# Altium PCB 175-00008 rev 1, PCB, M2 Focus Drive_OLD.PcbDoc (part 2 of 2)
Units mil, origin at the board's own origin, x right, y up, seen from the top; angles counter-clockwise.
Board outline 6885.96 x 6885.86 mil, 8 copper layers (Top Layer (*.GTL), Mid-Layer 1 (*.G1), +24V (*.GP1), GND (*.GP2), +5V (*.GP3), +12V (*.GP4), -12V (*.GP5), Bottom Layer (*.GBL)); 112 components, 149 nets, 812 pads, 83 vias.
Unrouted connection lines stored in the file: 204.
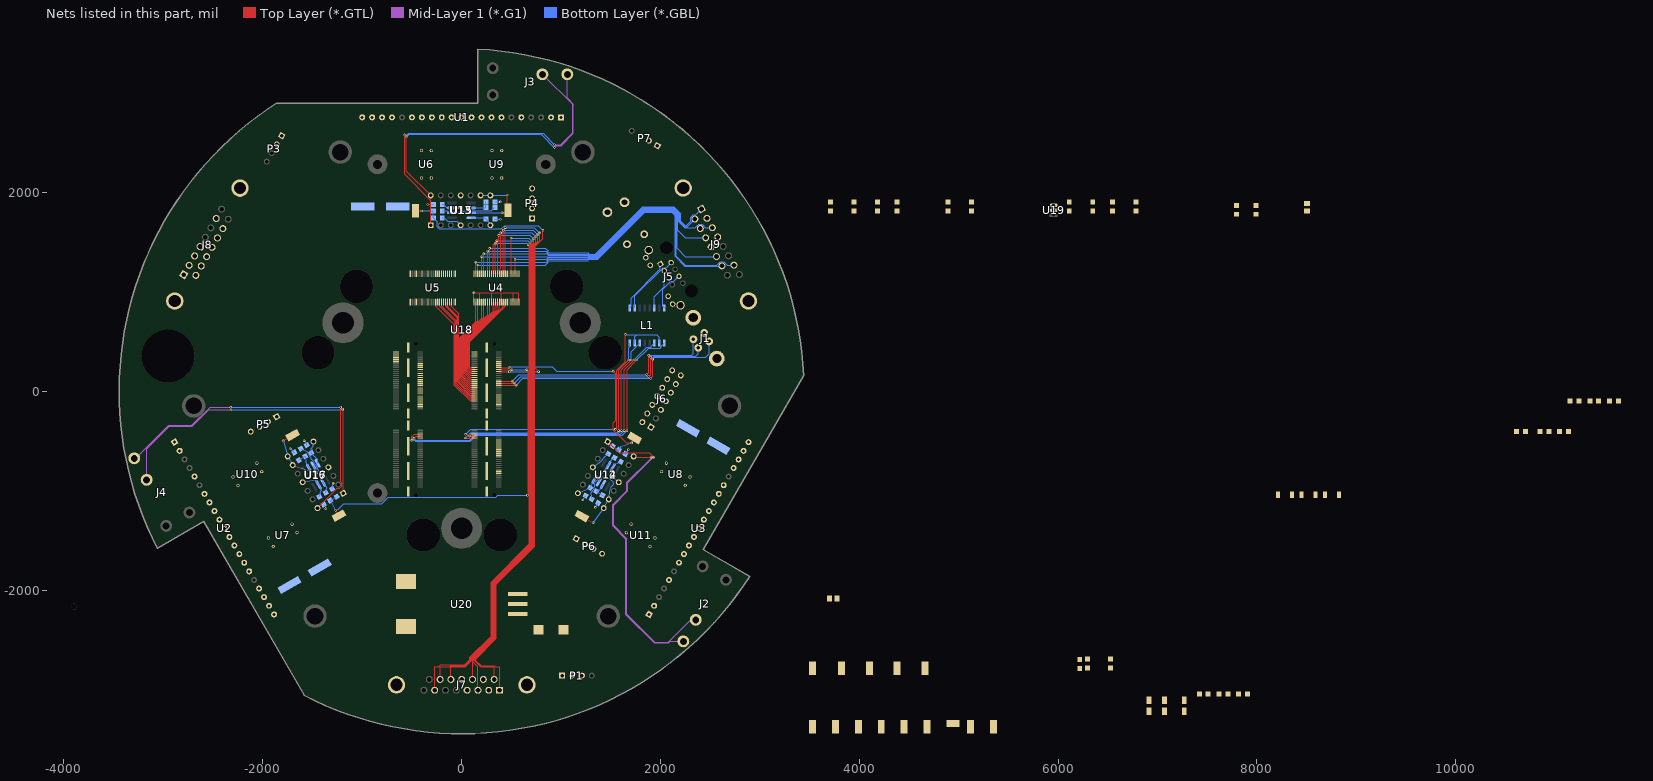
[diagram p8: the nets of this part, all layers, seen from the top]

## Via types
v1: diameter 24, hole 10, Top Layer (*.GTL) to Bottom Layer (*.GBL), 83 vias

## Nets (pads, with @x,y where several pads share a name; then routed paths per layer and width w, separated by ;. In a path a pad name is that pad's centre, name@x,y a point inside that pad or via, vN(x,y) a via of type N, cw(c..) or ccw(c..) an arc to the next point about the centre after c; other vN are vias at no path point)
1A+: J7.1 U4.32 | length 5908.2
  Top Layer (*.GTL) w5: J7.1@381.39,-3007.12 381.39,-2771 339.76,-2771 330.76,-2762 195.32,-2762 136.59,-2703.27 136.59,-2698 350,-2484.59 350,-1942 734,-1558 734,1463.93 785.49,1515.42 785.49,1592.49 v1(786.79,1593.79) ; U4.32@438.58,1182.72 438.58,1645.58 v1(439,1646)
  Bottom Layer (*.GBL) w5: v1(439,1646) 728.93,1646 781.14,1593.79 v1(786.79,1593.79)
1A-: J7.9 U4.33 | length 5703.6
  Top Layer (*.GTL) w5: J7.9@327.03,-2898.4 327.03,-2771 191.59,-2771 127.59,-2707 127.59,-2694.27 341,-2480.86 341,-1938.27 725,-1554.27 725,1467.65 765.7,1508.35 765.7,1572.7 v1(766.99,1573.99) ; U4.33@418.9,1182.72 418.9,1619.9 v1(419,1620)
  Bottom Layer (*.GBL) w5: v1(419,1620) 718.16,1620 764.17,1573.99 v1(766.99,1573.99)
1B+: J7.3 U4.35 | length 5628.6
  Top Layer (*.GTL) w5: J7.3@163.95,-3007.12 163.95,-2771 118.59,-2725.64 118.59,-2690.54 332,-2477.13 332,-1934.54 716,-1550.54 716,1471.38 745.9,1501.28 745.9,1552.9 v1(747.2,1554.2) ; U4.35@379.53,1182.72 379.53,1225.53 392,1238 v1(392,1594)
  Bottom Layer (*.GBL) w5: v1(392,1594) 707.39,1594 v1(747.2,1554.2)
1B-: J7.11 U4.36 | length 5448.2
  Top Layer (*.GTL) w5: J7.11@109.59,-2898.4 109.59,-2686.82 323,-2473.4 323,-1930.82 707,-1546.82 707,1475.11 726.1,1494.21 726.1,1533.1 v1(727.4,1534.4) ; U4.36@359.84,1182.72 364.5,1187.37 364.5,1499.34 373.5,1508.34 373.5,1567.5 v1(373,1568)
  Bottom Layer (*.GBL) w5: v1(373,1568) 685.31,1568 718.91,1534.4 v1(727.4,1534.4)
1I+: J7.14 U4.37 | length 5591.1
  Top Layer (*.GTL) w5: J7.14@-216.57,-2898.4 -216.57,-2771 -120.58,-2771 -111.58,-2762 32.86,-2762 91.59,-2703.27 91.59,-2679.36 305,-2465.95 305,-1923.36 689,-1539.36 689,1493.6 v1(687.8,1494.8) ; U4.37@340.16,1182.72 340.16,1466.99 355.5,1482.34 355.5,1515.5 v1(355,1516)
  Bottom Layer (*.GBL) w5: v1(355,1516) 663.77,1516 684.97,1494.8 v1(687.8,1494.8)
1I-: J7.7 U4.38 | length 5698.5
  Top Layer (*.GTL) w5: J7.7@-270.93,-3007.12 -270.93,-2771 -229.3,-2771 -211.3,-2753 29.13,-2753 82.59,-2699.54 82.59,-2675.63 296,-2462.22 296,-1919.63 680,-1535.63 680,1463 v1(668,1475) ; U4.38@320.47,1182.72 320.47,1473.47 v1(337,1490)
  Bottom Layer (*.GBL) w5: v1@336.03,1490 653,1490 v1(668,1475)
2A+: J9.1 U4.40 | length 2839.6
  Top Layer (*.GTL) w5: v1(281,1438) 281.1,1437.9 U4.40@281.1,1182.72
  Bottom Layer (*.GBL) w5: v1(281,1438) 843.33,1438 870,1411.33 870,1393 1273.66,1393 1280,1386.66 1280,1381 1346.63,1381 1820.63,1855 2134.37,1855 2203,1786.37 2203,1710.53 2250,1663.53 2259,1663.53 2305.07,1709.6 2305.07,1749.59 2329.38,1773.9 2353.61,1773.9 J9.1@2413.55,1833.84
2A-: J9.9 U4.41 | length 2692
  Top Layer (*.GTL) w5: v1(261,1410) 261.42,1409.58 U4.41@261.42,1182.72
  Bottom Layer (*.GBL) w5: v1(261,1410) 858.6,1410 861,1407.6 861,1389.27 870,1380.27 870,1380 1268.27,1380 1276.27,1372 1350.36,1372 1824.36,1846 2130.64,1846 2194,1782.64 2194,1706.8 2246.27,1654.53 2268.7,1654.53 J9.9@2346.57,1732.4
2B+: J9.3 U4.43 | length 2858.3
  Top Layer (*.GTL) w5: v1(222,1383) v1(222,1383) U4.43@222.05,1182.72
  Bottom Layer (*.GBL) w5: v1@222,1382 v1@223,1382 ; v1(222,1383) v1@223,1382 ; J9.3@2522.27,1645.53 2452.34,1645.53 2418.12,1679.75 2383.74,1679.75 2349.52,1645.53 2242.54,1645.53 2185,1703.08 2185,1778.91 2126.91,1837 1828.09,1837 1354.09,1363 1272.54,1363 1268.54,1367 870,1367 855,1382 243,1382 v1@223,1382
2B-: J9.11 U4.44 | length 2829.8
  Top Layer (*.GTL) w5: U4.44@202.36,1182.72 202.36,1353.36 v1(203,1354)
  Bottom Layer (*.GBL) w5: v1(203,1354) 1357.82,1354 1831.82,1828 2123.18,1828 2176,1775.18 2176,1618.09 2250,1544.09 J9.11@2455.29,1544.09
2I+: J9.14 U4.46 | length 3239.8
  Top Layer (*.GTL) w5: U4.46@162.99,1182.72 v1(163,1270)
  Bottom Layer (*.GBL) w5: v1(163,1270) 843.33,1270 870,1296.67 870,1315 1273.66,1315 1280,1321.34 1280,1327 1369,1327 1843,1801 2112,1801 2149,1764 2149,1357.19 2246.27,1259.91 2616.65,1259.91 J9.14@2618.37,1261.63
2I-: J9.7 U4.47 | length 3427.3
  Top Layer (*.GTL) w5: v1(143,1299) 143.31,1298.69 U4.47@143.31,1182.72
  Bottom Layer (*.GBL) w5: v1(143,1299) 144,1298 858.6,1298 861,1300.4 861,1318.73 870,1327.73 870,1328 1268.27,1328 1276.27,1336 1365.27,1336 1839.27,1810 2115.73,1810 2158,1767.73 2158,1360.91 2250,1268.91 2566.96,1268.91 2601.18,1303.13 2635.56,1303.13 2669.78,1268.91 J9.7@2739.7,1268.91
3.3V: R4.2 R5.2 R6.2 R18.2 R26.2 R27.2 R28.2 U18.B121
3A+: J8.1 U5.27
3A-: J8.9 U5.29
3B+: J8.3 U5.30
3B-: J8.11 U5.32
3I+: J8.14 U5.33
3I-: J8.7 U5.35
24V: R1.2 R2.2 R3.2
+3.3V: U4.7 U4.18 U4.31 U4.42 U5.7 U5.18 U5.31 U5.42
+5V: C7.1 C8.1 C9.1 C12.POS J7.4 J7.12 J8.4 J8.12 J9.4 J9.12 TP17.1 U1.14 U2.14 U3.14 U20.3
+12V: C22.2 C23.2 C28.2 R20.1 R22.1 R23.1 U12.11 U13.11 U14.7 U15.7 U16.11 U17.7 | length 806.8
  Bottom Layer (*.GBL) w5: U16.11@-1599.9,-915 -1475,-891 U17.7@-1438.42,-941.03 -1412,-997 C28.2@-1432.5,-1061.03 ; C23.2@-195,1880 -186,1880 -151,1845 U15.7@-96.46,1845 -25,1845 v1(-24,1846) ; U12.11@1579.9,-915 1491,-842 1490,-822 U14.7@1519.88,-768.97 1540,-736 C22.2@1602.5,-708.97
+24V: C1.1 C2.1 C3.1 C4.2 C5.2 C6.2 C10.1 F1.2 P1.1 TP16.1 U1.12 U2.12 U3.12 U18.B55 U20.1
-12V: C25.2 C27.2 C30.2 U12.7 U13.7 U14.4 U15.4 U16.7 U17.4 | length 718.2
  Bottom Layer (*.GBL) w5: U16.7@-1490.1,-505.19 -1490.1,-554.1 -1512.5,-576.5 C30.2@-1512.5,-618.97 -1512.5,-622.5 -1448.28,-686.72 U17.4@-1448.28,-723.97 ; U15.4@96.46,1745 231,1745 290,1686 U13.7@290,1670 ; U12.7@1170.1,-1024.81 C25.2@1292.5,-971.03 U14.4@1336.82,-886.03
CURRENT_AX1: TP1.1 U1.5 U18.A2
CURRENT_AX2: TP2.1 U2.5 U18.A4
CURRENT_AX3: TP3.1 U3.5 U18.A6
DIRECTION1: TP7.1 U1.16 U18.B39
DIRECTION2: TP8.1 U2.16 U18.B41
DIRECTION3: TP9.1 U3.16 U18.B43
DRVFAULT_AX1: U1.19 U18.A73
DRVFAULT_AX2: U2.19 U18.A77
DRVFAULT_AX3: U3.19 U18.A81
EMU: J6.2 U18.A47
ENCDR_FAULT_AX1: U4.20 U18.A83
ENCDR_FAULT_AX2: U4.22 U18.A85
ENCDR_FAULT_AX3: U4.23 U18.A87
ETHERGND: U18.B69
ETHERLED_ACT: R17.1 U18.A103
ETHERLED_FD: R16.1 U18.A105
ETHERRX+: L1.11 U18.B67 | length 3268.2
  Top Layer (*.GTL) w5: v1(-481,-474) -457.8,-450.8 U18.B67@-417.32,-450.8 ; v1(1636,-395) 1636,215 v1(1736,315)
  Bottom Layer (*.GBL) w5: v1(-481,-474) -462.36,-492.64 80.64,-492.64 140.27,-433 1596.16,-433 1634.16,-395 v1(1636,-395) ; v1(1736,315) 1864.5,443.5 1905.19,443.5 1909,447.31 1909,454 L1.11@1940,485
ETHERRX-: L1.9 U18.B65 | length 3446.3
  Top Layer (*.GTL) w5: v1(-500.8,-493.8) -500.8,-454.8 -477.11,-431.11 U18.B65@-417.32,-431.11 ; v1(1664,-395) 1664,215 v1(1764,315)
  Bottom Layer (*.GBL) w5: v1(-500.8,-493.8) -473.93,-493.8 -466.09,-501.64 84.36,-501.64 144,-442 1615.16,-442 1662.16,-395 v1(1664,-395) ; v1(1764,315) 1883.5,434.5 1996.19,434.5 2009,447.31 2009,454 L1.9@2040,485
ETHERTX+: L1.16 U18.A70 | length 2596.4
  Top Layer (*.GTL) w5: v1(35,-470) 129.05,-470 U18.A70@129.53,-470.48 ; v1(1580,-395) 1580,215 v1(1680,315)
  Bottom Layer (*.GBL) w5: v1(35,-470) 90,-415 1560,-415 v1(1580,-395) ; v1(1680,315) 1680,437.19 1690,447.19 L1.16@1690,485
ETHERTX-: L1.14 U18.A68 | length 2560.9
  Top Layer (*.GTL) w5: v1(79.66,-451.5) 80.37,-450.8 U18.A68@129.53,-450.8 ; v1(1608,-395) 1608,215 v1(1708,315)
  Bottom Layer (*.GBL) w5: v1(79.66,-451.5) 79.66,-445.34 101,-424 1577.16,-424 1606.16,-395 v1(1608,-395) ; v1(1708,315) 1708,396.31 1759,447.31 1759,454 L1.14@1790,485
FAN_PWM: P1.2 U18.B10
FAN_TACH: R19.1 U18.B57
FULL_STEP_AX1: U1.18 U18.A71
FULL_STEP_AX2: U2.18 U18.A75
FULL_STEP_AX3: U3.18 U18.A79
GND: C1.2 C2.2 C3.2 C4.1 C5.1 C6.1 C7.2 C8.2 C9.2 C10.2 C12.NEG C22.1 C23.1 C24.1 C25.1 C26.1 C27.1 C28.1 C29.1 C30.1 C31.1 C32.1 C33.1 J1.4 J1.5 J1.6 J5.10 J5.11 J5.13 J5.14 J6.1 J6.4 J6.7 J6.9 J6.11 J6.13 J7.2 J7.10 J7.16 J7.17 J8.2 J8.10 J8.16 J8.17 J9.2 J9.10 J9.16 J9.17 P2.2 P3.2 P7.2 R7.1 R9.1 R13.1 S1.1 S2.1 S3.1 U1.11 U2.11 U3.11 U4.1 U4.4 U4.10 U4.15 U4.21 U4.24 U4.25 U4.28 U4.34 U4.39 U4.45 U4.48 U5.1 U5.4 U5.10 U5.15 U5.21 U5.24 U5.25 U5.28 U5.34 U5.39 U5.45 U5.48 U6.E U7.E U8.E U9.E U9.K U10.E U10.K U11.E U11.K U12.4 U13.4 U16.4 U18.A121 U18.A122 U18.B4 U18.B8 U18.B12 U18.B19 U18.B29 U18.B49 U18.B53 U18.B122 U19.3 U20.2 | length 1982.6
  Top Layer (*.GTL) w10: U4.1@123.62,897.28 v1(123.62,990) 576.38,990 U4.24@576.38,897.28 ; U4.4@182.68,897.28 182.68,990 ; U4.10@300.79,897.28 300.79,990 ; U4.15@399.21,897.28 399.21,990 ; U4.21@517.32,897.28 517.32,990
  Bottom Layer (*.GBL) w10: v1(-1725,-575) -1723.53,-575 R13.1@-1682.5,-616.03 ; v1(-1584,-496) -1557.5,-522.5 C30.1@-1557.5,-541.03 ; C28.1@-1387.5,-1138.97 v1(-1366,-1182) ; C29.1@-1302.5,-981.03 v1(-1292,-924) ; v1(-341,1879) -340,1880 C23.1@-285,1880 ; C26.1@-195,1745 -173,1745 -138,1710 -50,1710 U13.4@-10,1670 ; C27.1@334,1732 390,1732 v1(391,1731) ; R9.1@335,1905 389,1905 v1(390,1906) ; v1(1220,-1093) C25.1@1247.5,-1048.97 ; U12.4@1320.1,-765 1405,-702 1408,-697 1429,-667 C24.1@1476.5,-628.97 ; v1(1345,-1168) R7.1@1372.5,-1123.97 ; C22.1@1647.5,-631.03 v1(1677,-586)
INDEX1+: U4.12 U18.A26 | length 922
  Top Layer (*.GTL) w5: U18.A26@129.53,159.44 85,159.44 44,200.44 44,513.52 340.16,809.68 U4.12@340.16,897.28
INDEX1-: U4.11 U18.A28 | length 941
  Top Layer (*.GTL) w5: U18.A28@129.53,139.75 85,139.75 35,189.75 35,517.25 320.47,802.72 U4.11@320.47,897.28
INDEX2+: U4.3 U18.A38 | length 1011.5
  Top Layer (*.GTL) w5: U18.A38@129.53,41.33 85,41.33 -10,136.33 -10,535.89 162.99,708.88 U4.3@162.99,897.28
INDEX2-: U4.2 U18.A40 | length 1030.5
  Top Layer (*.GTL) w5: U18.A40@129.53,21.64 85,21.64 -19,125.64 -19,539.62 143.31,701.92 U4.2@143.31,897.28
INDEX3+: U5.16 U18.A50 | length 1145.4
  Top Layer (*.GTL) w5: U5.16@-221.1,897.28 -221.1,857.19 -64,700.09 -64,72.22 85,-76.78 U18.A50@129.53,-76.78
INDEX3-: U5.14 U18.A52 | length 1181.4
  Top Layer (*.GTL) w5: U5.14@-260.47,897.28 -260.47,857.19 -73,669.72 -73,61.53 85,-96.47 U18.A52@129.53,-96.47
IR_TEMP1: C26.2 R12.2 TP11.1 U18.A21 | length 3329.8
  Top Layer (*.GTL) w5: TP11.1@-465,1815 -464,1814 v1(-403,1814) ; U18.A21@372.83,198.81 374.64,197 v1(480,197) ; v1(775,198) 743,230 743,1460.2 818,1535.2 v1(818,1619)
  Bottom Layer (*.GBL) w5: v1(-403,1814) -402,1815 R12.2@-285,1815 C26.2@-285,1745 -246.03,1706.03 -246.03,1655.08 -224.92,1633.97 400.81,1633.97 431.34,1664.5 772.5,1664.5 v1(818,1619) ; v1(480,197) 481,198 v1(775,198)
IR_TEMP2: C29.2 R15.2 TP14.1 U18.A19 | length 3800.6
  Top Layer (*.GTL) w5: v1(-1269,-1197) TP14.1@-1235,-1250 ; U18.A19@372.83,218.49 504.51,218.49 v1(505,218) ; v1(657,218) 671,204 671,-1038 663,-1046 v1(661,-1046)
  Bottom Layer (*.GBL) w5: C29.2@-1257.5,-1058.97 R15.2@-1322.5,-1098.97 -1303,-1135 v1(-1269,-1197) -1241,-1187 -1184.13,-1130.13 -802.34,-1130.13 -740.21,-1068 342.04,-1068 364.04,-1046 v1(661,-1046) ; v1(505,218) v1(657,218)
IR_TEMP3: C24.2 R11.2 TP10.1 U18.A17 | length 2307.4
  Top Layer (*.GTL) w5: U18.A17@372.83,238.18 373.66,239 v1(478,239) ; v1(1525,202) 1552.5,174.5 1552.5,-293 1527.5,-318 1527.5,-390.66 1655.84,-519 v1(1710,-519) TP10.1@1740,-470
  Bottom Layer (*.GBL) w5: v1(478,239) 484,245 912,245 955,202 v1(1525,202) ; C24.2@1521.5,-551.03 R11.2@1582.5,-591.03 1606,-553 v1(1710,-519)
NEGLIMT1: R26.1 U9.C U18.B27
NEGLIMT2: R27.1 U10.C U18.B25
NEGLIMT3: R28.1 U11.C U18.B23
NetF1_1: F1.1 P2.1
NetJ2_1: J2.1 U12.1 | length 3237.3
  Top Layer (*.GTL) w5: U12.1@1470.1,-505.19 1584.07,-619.16 1889.33,-619.16 1932.16,-662 v1(1934,-662)
  Mid-Layer 1 (*.G1) w5: v1(1934,-662) 1932.16,-662 1913.66,-680.5 1912.23,-680.5 1671.64,-921.09 1671.64,-1002.36 1528,-1146 1528,-1349 1662,-1483 1662,-2243 1941.64,-2522.64 2079.64,-2522.64 2303.7,-2298.57 J2.1@2355.24,-2298.57
NetJ2_2: J2.2 U12.14 | length 2681.6
  Top Layer (*.GTL) w5: U12.14@1729.9,-655.19 1736.71,-662 v1(1906,-662)
  Mid-Layer 1 (*.G1) w5: v1(1906,-662) 1906,-674 1662.64,-917.36 1662.64,-998.64 1519,-1142.27 1519,-1352.73 1653,-1486.73 1653,-2246.73 1937.91,-2531.64 2083.36,-2531.64 2099.92,-2515.08 J2.2@2230.24,-2515.08
NetJ3_1: J3.1 U13.1 | length 3529
  Top Layer (*.GTL) w5: v1(-574.8,2579.8) -573.5,2578.5 -573.5,2182.55 -310,1919.05 U13.1@-310,1670
  Mid-Layer 1 (*.G1) w5: J3.1@812.99,3188.97 1116,2885.96 1116,2599 997,2480 v1(934,2480)
  Bottom Layer (*.GBL) w5: v1(-574.8,2579.8) -547.93,2579.8 -532.73,2595 819,2595 v1(934,2480)
NetJ3_2: J3.2 U13.14 | length 3116.5
  Top Layer (*.GTL) w5: v1(-555,2560) -555,2215 U13.14@-310,1970
  Mid-Layer 1 (*.G1) w5: v1(934,2452) 953,2471 1000.73,2471 1125,2595.27 1125,2889.69 1062.99,2951.7 J3.2@1062.99,3188.97
  Bottom Layer (*.GBL) w5: v1(-555,2560) -529,2586 800,2586 v1(934,2452)
NetJ4_1: J4.1 U16.1 | length 3296
  Top Layer (*.GTL) w5: v1(-1197,-180) -1190.1,-186.9 U16.1@-1190.1,-1024.81
  Mid-Layer 1 (*.G1) w5: J4.1@-3168.23,-890.43 -3168.23,-578.23 -2943,-353 -2709.27,-353 -2544.27,-188 v1(-2322,-188)
  Bottom Layer (*.GBL) w5: v1(-2322,-188) -1205,-188 v1(-1197,-180)
NetJ4_2: J4.2 U16.14 | length 3425.2
  Top Layer (*.GTL) w5: U16.14@-1449.9,-1174.81 -1249.33,-974.23 -1225.17,-974.23 -1204.07,-953.13 -1204.07,-923.28 -1216.8,-910.55 v1(-1216.8,-160.2)
  Mid-Layer 1 (*.G1) w5: J4.2@-3293.23,-673.92 -3276.65,-673.92 -2946.73,-344 -2713,-344 -2529,-160 v1(-2322,-160)
  Bottom Layer (*.GBL) w5: v1(-2322,-160) -2321.8,-160.2 v1(-1216.8,-160.2)
NetJ5_1: J5.1 L1.1 | length 568.4
  Bottom Layer (*.GBL) w5: L1.1@1690,840 1705.12,855.12 1705.12,936.65 2000,1231.53 J5.1@2000,1280
NetJ5_2: J5.2 L1.2 | length 624.8
  Bottom Layer (*.GBL) w5: L1.2@1740,840 1740,958.8 2025.92,1244.72 2055.96,1244.72 J5.2@2106.6,1295.36
NetJ5_3: J5.3 L1.6 | length 412.1
  Bottom Layer (*.GBL) w5: L1.6@1940,840 1940,952.97 2040,1052.97 J5.3@2040,1210.72
NetJ5_6: J5.6 L1.8 | length 408.3
  Bottom Layer (*.GBL) w5: L1.8@2040,840 2024.12,855.88 2024.12,1024.35 2105.92,1106.15 2135.96,1106.15 J5.6@2186.6,1156.79
NetJ5_9: J5.9 R16.2
NetJ5_12: J5.12 R17.2
NetJ6_5: J6.5 R18.1
NetP1_3: P1.3 R19.2
NetP3_1: P3.1 R23.2 R24.2
NetP4_1: P4.1 U1.1
NetP4_2: P4.2 U1.2
NetP4_3: P4.3 U1.20
NetP4_4: P4.4 U1.21
NetP5_1: P5.1 U2.1
NetP5_2: P5.2 U2.2
NetP5_3: P5.3 U2.20
NetP5_4: P5.4 U2.21
NetP6_1: P6.1 U3.1
NetP6_2: P6.2 U3.2
NetP6_3: P6.3 U3.20
NetP6_4: P6.4 U3.21
NetP7_1: P7.1 R22.2 R25.2
NetR1_1: R1.1 U6.A
NetR2_1: R2.1 U7.A
NetR3_1: R3.1 U8.A
NetR7_2: R7.2 R8.1 U14.2 | length 180.6
  Bottom Layer (*.GBL) w5: R7.2@1417.5,-1046.03 R8.1@1352.5,-1006.03 1390,-990 U14.2@1423.42,-936.03
NetR8_2: R8.2 R11.1 U14.6 | length 494.7
  Bottom Layer (*.GBL) w5: R8.2@1307.5,-1083.97 1300,-1025 1325.06,-990.56 1333.15,-972.88 1336,-961 1335,-942 1356.24,-902.24 1363,-894 1374.58,-874.58 U14.6@1476.58,-743.97 1507,-694 R11.1@1537.5,-668.97
NetR9_2: R9.2 R10.1 U15.2 | length 205.6
  Bottom Layer (*.GBL) w5: U15.2@96.46,1845 240,1845 R10.1@245,1850 R9.2@245,1905
NetR10_2: R10.2 R12.1 U15.6 | length 561.1
  Bottom Layer (*.GBL) w5: R12.1@-195,1815 -151,1815 -131,1795 U15.6@-96.46,1795 -91.46,1800 9,1800 24.28,1815.28 300.28,1815.28 R10.2@335,1850
NetR13_2: R13.2 R14.1 U17.2 | length 205.9
  Bottom Layer (*.GBL) w5: R13.2@-1637.5,-693.97 R14.1@-1572.5,-653.97 -1570,-714 U17.2@-1534.88,-773.97
NetR14_2: R14.2 R15.1 U17.6 | length 543.4
  Bottom Layer (*.GBL) w5: R14.2@-1617.5,-576.03 -1559,-602 -1534,-650 -1520.14,-668.62 -1518,-679 -1498,-692 -1475,-732 -1469.94,-737.94 -1463,-747 -1460.35,-750 -1460.12,-754.12 -1454.06,-768 -1452,-777 -1410,-839 U17.6@-1395.12,-916.03 -1359,-972 R15.1@-1367.5,-1021.03
NetR20_2: R20.2 R21.2 U19.2
NetS1_2: S1.2 U1.13
NetS2_2: S2.2 U2.13
NetS3_2: S3.2 U3.13
NetTP12_1: TP12.1 U12.8 U12.9 U14.3 | length 791.8
  Top Layer (*.GTL) w5: TP12.1@1210,-1255 v1(1323,-1322)
  Bottom Layer (*.GBL) w5: v1(1323,-1322) U12.8@1429.9,-1174.81 U12.9@1479.9,-1088.21 1494.28,-986.28 1497,-978 1501,-969 1504,-959 1523,-938 1521,-904 1447,-856 1414,-858 U14.3@1380.12,-911.03
NetTP13_1: TP13.1 U13.8 U13.9 U15.3 | length 805.3
  Top Layer (*.GTL) w5: v1(407,1796) 441,1796 461,1816 v1(461,1975)
  Bottom Layer (*.GBL) w5: U15.3@96.46,1795 406,1795 v1(407,1796) ; U13.9@190,1970 U13.8@290,1970 456,1970 v1(461,1975)
NetTP15_1: TP15.1 U16.8 U16.9 U17.3 | length 714.7
  Top Layer (*.GTL) w5: v1(-1794,-499) TP15.1@-1700,-440
  Mid-Layer 1 (*.G1) w5: U16.9@-1699.9,-741.79 v1(-1456,-823)
  Bottom Layer (*.GBL) w5: v1(-1794,-499) U16.8@-1749.9,-655.19 U16.9@-1699.9,-741.79 ; U17.3@-1491.58,-748.97 -1457,-802 v1(-1456,-823)
NetU6_K: U6.K U9.A
NetU7_K: U7.K U10.A
NetU8_K: U8.K U11.A
PCB_TEMP: C31.2 R21.1 TP18.1 U18.A15
POSLIMT1: R4.1 U6.C U18.B17
POSLIMT2: R5.1 U7.C U18.B15
POSLIMT3: R6.1 U8.C U18.B13
QUADA1+: U4.17 U18.A18 | length 854.2
  Top Layer (*.GTL) w5: U18.A18@129.53,238.18 85,238.18 80,243.18 80,498.61 438.58,857.19 U4.17@438.58,897.28
QUADA1-: U4.16 U18.A20 | length 873.2
  Top Layer (*.GTL) w5: U18.A20@129.53,218.49 85,218.49 71,232.49 71,502.34 418.9,850.24 U4.16@418.9,897.28
QUADA2+: U4.9 U18.A30 | length 951.8
  Top Layer (*.GTL) w5: U18.A30@129.53,120.07 85,120.07 26,179.07 26,520.98 281.1,776.08 U4.9@281.1,897.28
QUADA2-: U4.8 U18.A32 | length 970.8
  Top Layer (*.GTL) w5: U18.A32@129.53,100.38 85,100.38 17,168.38 17,524.7 261.42,769.12 U4.8@261.42,897.28
QUADA3+: U5.22 U18.A42 | length 1017.7
  Top Layer (*.GTL) w5: U5.22@-102.99,897.28 -102.99,857.19 -28,782.2 -28,114.96 85,1.96 U18.A42@129.53,1.96
QUADA3-: U5.20 U18.A44 | length 1053.7
  Top Layer (*.GTL) w5: U5.20@-142.36,897.28 -142.36,857.19 -37,751.83 -37,104.27 85,-17.73 U18.A44@129.53,-17.73
QUADB1+: U4.14 U18.A22 | length 884.1
  Top Layer (*.GTL) w5: U18.A22@129.53,198.81 85,198.81 62,221.81 62,506.07 379.53,823.59 U4.14@379.53,897.28
QUADB1-: U4.13 U18.A24 | length 903
  Top Layer (*.GTL) w5: U18.A24@129.53,179.12 85,179.12 53,211.12 53,509.79 359.84,816.64 U4.13@359.84,897.28
QUADB2+: U4.6 U18.A34 | length 981.7
  Top Layer (*.GTL) w5: U18.A34@129.53,80.7 85,80.7 8,157.7 8,528.43 222.05,742.48 U4.6@222.05,897.28
QUADB2-: U4.5 U18.A36 | length 1000.7
  Top Layer (*.GTL) w5: U18.A36@129.53,61.01 85,61.01 -1,147.01 -1,532.16 202.36,735.52 U4.5@202.36,897.28
QUADB3+: U5.19 U18.A46 | length 1081.6
  Top Layer (*.GTL) w5: U5.19@-162.05,897.28 -162.05,857.19 -46,741.15 -46,93.59 85,-37.41 U18.A46@129.53,-37.41
QUADB3-: U5.17 U18.A48 | length 1117.5
  Top Layer (*.GTL) w5: U5.17@-201.42,897.28 -201.42,857.19 -55,710.77 -55,82.9 85,-57.1 U18.A48@129.53,-57.1
STEP1: TP4.1 U1.15 U18.B31
STEP2: TP5.1 U2.15 U18.B33
STEP3: TP6.1 U3.15 U18.B35
STEP_RES0: U1.7 U2.7 U3.7 U18.B47
STEP_RES1: U1.8 U2.8 U3.8 U18.B51
STEP_RES2: U1.9 U2.9 U3.9 U18.B2
STEP_RES3: U1.10 U2.10 U3.10 U18.B6
SUPPORT: U20.0
TCK: J6.8 U18.A55
TDI: J6.12 U18.A49
TDO: J6.14 U18.A53
TMS: J6.6 U18.A51
TRST: J6.10 U18.A45
TRUSS_TEMP1: C32.2 R24.1 TP19.1 U18.A13
TRUSS_TEMP2: C33.2 R25.1 TP20.1 U18.A11
USB_D+: J1.3 U18.A35 | length 2473.4
  Top Layer (*.GTL) w5: U18.A35@372.83,61.01 546.21,61.01 v1(547.6,62.4) ; v1(1902,129) 1922,149 v1(1922,323)
  Bottom Layer (*.GBL) w5: v1(547.6,62.4) 614.2,129 v1(1902,129) ; v1(1922,323) 1943,344 2454.82,344 2489.82,379 J1.3@2489.82,501.77
USB_D-: J1.2 U18.A33 | length 2293.1
  Top Layer (*.GTL) w5: U18.A33@372.83,80.7 526.3,80.7 v1(527.8,82.2) ; v1(1882.2,148.8) 1902.2,168.8 v1(1902.2,342.8)
  Bottom Layer (*.GBL) w5: v1(527.8,82.2) 594.4,148.8 v1(1882.2,148.8) ; v1(1902.2,342.8) 1929.07,342.8 1939.27,353 2354.71,353 2380.71,379 J1.2@2380.71,438.78
USB_VBUS: J1.1 U18.A31 | length 2321.5
  Top Layer (*.GTL) w5: U18.A31@372.83,100.38 506.38,100.38 v1(508,102) ; v1(1862.4,168.6) 1882.4,188.6 v1(1882.4,362.6)
  Bottom Layer (*.GBL) w5: v1(508,102) 574.6,168.6 v1(1862.4,168.6) ; v1(1882.4,362.6) 1883,362 2314.5,362 2331.5,379 J1.1@2331.5,524.02
VA25: L1.10 L1.15 U18.A66 | length 3125.6
  Top Layer (*.GTL) w5: v1(39,-434) 41.89,-431.11 U18.A66@129.53,-431.11 ; v1(1546,-383) 1561.5,-367.5 1561.5,209.23 1648,295.73 v1(1648,572)
  Bottom Layer (*.GBL) w5: v1(39,-434) 90,-383 v1(1546,-383) ; v1(1648,572) 1649,571 1761,571 ; L1.15@1740,485 1740,550 1761,571 ; L1.10@1990,485 1990,546 1965,571 1761,571
~1FAULT: J7.13 U4.29 | length 5415.8
  Top Layer (*.GTL) w5: J7.13@-107.85,-2898.4 -107.85,-2771 36.59,-2771 100.59,-2707 100.59,-2683.09 314,-2469.68 314,-1927.09 698,-1543.09 698,1478.84 706.3,1487.14 706.3,1513.3 v1(707.6,1514.6) ; U4.29@497.64,1182.72 497.64,1541.64 v1(498,1542)
  Bottom Layer (*.GBL) w5: v1(498,1542) 674.54,1542 701.94,1514.6 v1(707.6,1514.6)
~2FAULT: J9.13 U4.27 | length 2762.7
  Top Layer (*.GTL) w5: U4.27@537.01,1182.72 v1(537,1327)
  Bottom Layer (*.GBL) w5: v1(537,1327) 538,1326 855,1326 870,1341 1268.54,1341 1272.54,1345 1361.54,1345 1835.54,1819 2119.46,1819 2167,1771.46 2167,1438.79 2250,1355.79 J9.13@2564.01,1355.79
~3FAULT: J8.13 U4.26
pads on no net: J2.0 J3.0 J4.0 J5.4 J5.5 J5.7 J5.8 J5.MH1 J5.MH2 J6.3 J7.5 J7.6 J7.8 J7.15 J8.5 J8.6 J8.8 J8.15 J9.5 J9.6 J9.8 J9.15 L1.3 L1.4 L1.5 L1.7 L1.12 L1.13 P1.4 P3.3 P3.4 P7.3 P7.4 U1.3 U1.4 U1.6 U1.17 U2.3 U2.4 U2.6 U2.17 U3.3 U3.4 U3.6 U3.17 U4.19 U4.30 U5.2 U5.3 U5.5 U5.6 U5.8 U5.9 U5.11 U5.12 U5.13 U5.23 U5.26 U5.36 U5.37 U5.38 U5.40 U5.41 U5.43 U5.44 U5.46 U5.47 U12.2 U12.3 U12.5 U12.6 U12.10 U12.12 U12.13 U13.2 U13.3 U13.5 U13.6 U13.10 U13.12 U13.13 U14.1 U14.5 U14.8 U15.1 U15.5 U15.8 U16.2 U16.3 U16.5 U16.6 U16.10 U16.12 U16.13 U17.1 U17.5 U17.8 U18.0 U18.1 U18.A1 U18.A3 U18.A5 U18.A7 U18.A8 U18.A9 U18.A10 U18.A12 U18.A14 U18.A16 U18.A23 U18.A25 U18.A27 U18.A29 U18.A37 U18.A39 U18.A41 U18.A43 U18.A54 U18.A56 U18.A57 U18.A58 U18.A59 U18.A60 U18.A61 U18.A62 U18.A63 U18.A64 U18.A65 U18.A67 U18.A69 U18.A72 U18.A74 U18.A76 U18.A78 U18.A80 U18.A82 U18.A84 U18.A86 U18.A88 U18.A89 U18.A90 U18.A91 U18.A92 U18.A93 U18.A94 U18.A95 U18.A96 U18.A97 U18.A98 U18.A99 U18.A100 U18.A101 U18.A102 U18.A104 U18.A106 U18.A107 U18.A108 U18.A109 U18.A110 U18.A111 U18.A112 U18.A113 U18.A114 U18.A115 U18.A116 U18.A117 U18.A118 U18.A119 U18.A120 U18.B1 U18.B3 U18.B5 U18.B7 U18.B9 U18.B11 U18.B14 U18.B16 U18.B18 U18.B20 U18.B21 U18.B22 U18.B24 U18.B26 U18.B28 U18.B30 U18.B32 U18.B34 U18.B36 U18.B37 U18.B38 U18.B40 U18.B42 U18.B44 U18.B45 U18.B46 U18.B48 U18.B50 U18.B52 U18.B54 U18.B56 U18.B58 U18.B59 U18.B60 U18.B61 U18.B62 U18.B63 U18.B64 U18.B66 U18.B68 U18.B70 U18.B71 U18.B72 U18.B73 U18.B74 U18.B75 U18.B76 U18.B77 U18.B78 U18.B79 U18.B80 U18.B81 U18.B82 U18.B83 U18.B84 U18.B85 U18.B86 U18.B87 U18.B88 U18.B89 U18.B90 U18.B91 U18.B92 U18.B93 U18.B94 U18.B95 U18.B96 U18.B97 U18.B98 U18.B99 U18.B100 U18.B101 U18.B102 U18.B103 U18.B104 U18.B105 U18.B106 U18.B107 U18.B108 U18.B109 U18.B110 U18.B111 U18.B112 U18.B113 U18.B114 U18.B115 U18.B116 U18.B117 U18.B118 U18.B119 U18.B120 U19.1

## Polygon pours and split planes (outlines as drawn)
+24V on +24V (*.GP1) (split plane): 161 vertices, not listed, extent -3424.75,-3424.77 3420.67,3419.56
GND on GND (*.GP2) (split plane): 161 vertices, not listed, extent -3424.75,-3424.77 3420.67,3419.56
+5V on +5V (*.GP3) (split plane): 161 vertices, not listed, extent -3424.75,-3424.77 3420.67,3419.56
+12V on +12V (*.GP4) (split plane): 161 vertices, not listed, extent -3424.75,-3424.77 3420.67,3419.56
-12V on -12V (*.GP5) (split plane): 161 vertices, not listed, extent -3424.75,-3424.77 3420.67,3419.56

## Other copper
Top Layer (*.GTL):
  rectangle: 984.25,2165.35 1456.69,2637.8
  rectangle: -1455.75,2165.35 -983.31,2637.8
  region: -1553.74,-2575.96 -1144.59,-2339.74 -1380.81,-1930.59 -1789.96,-2166.81
  region: -2773.74,-461.96 -2364.59,-225.74 -2600.81,183.41 -3009.96,-52.81
  region: 1569.19,-2575.96 1805.41,-2166.81 1396.26,-1930.59 1160.04,-2339.74
  region: 2789.19,-461.96 3025.41,-52.81 2616.26,183.41 2380.04,-225.74

## Silkscreen, mask and mechanical layers (free items; w line width, h text height)
Top Overlay:
  lines w0.79: -2386.68,-1377.96 1193.34,688.97 ; -1193.34,688.97 2386.68,-1377.96
  text "1" at 549,2438 h196.85
  text "3" at 1772.12,-720.81 h196.85
  text "2" at -1460.88,-1401.81 h196.85

## Text inside footprints (layer, text, board x,y; h text height)
J6: Top Overlay "2" at 1775.72,-423.92 h50 r60; Top Overlay "1" at 1862.32,-473.92 h50 r60; Top Overlay "14" at 2175.72,268.9 h50 r60; Top Overlay "13" at 2262.32,218.9 h50 r60
P2: Top Overlay "1" at 1681.72,2153.35 h40 r210
U1: Top Overlay "1" at 1011.81,2976.37 h40 r180
U2: Top Overlay "1" at -3083.52,-611.94 h40 r300
U3: Top Overlay "1" at 2071.71,-2364.45 h40 r60
U18: Top Overlay "B1" at -295.28,433.06 h50 r90; Top Overlay "A1" at 492.13,433.06 h50 r90